# Altium PCB MidBoard.PcbDoc (part 2 of 3)
Units mm, origin at the board's own origin, x right, y up, seen from the top; angles counter-clockwise.
Board outline 150.95 x 96 mm, 2 copper layers (Top Layer, Bottom Layer); 315 components, 238 nets, 1021 pads, 291 vias.
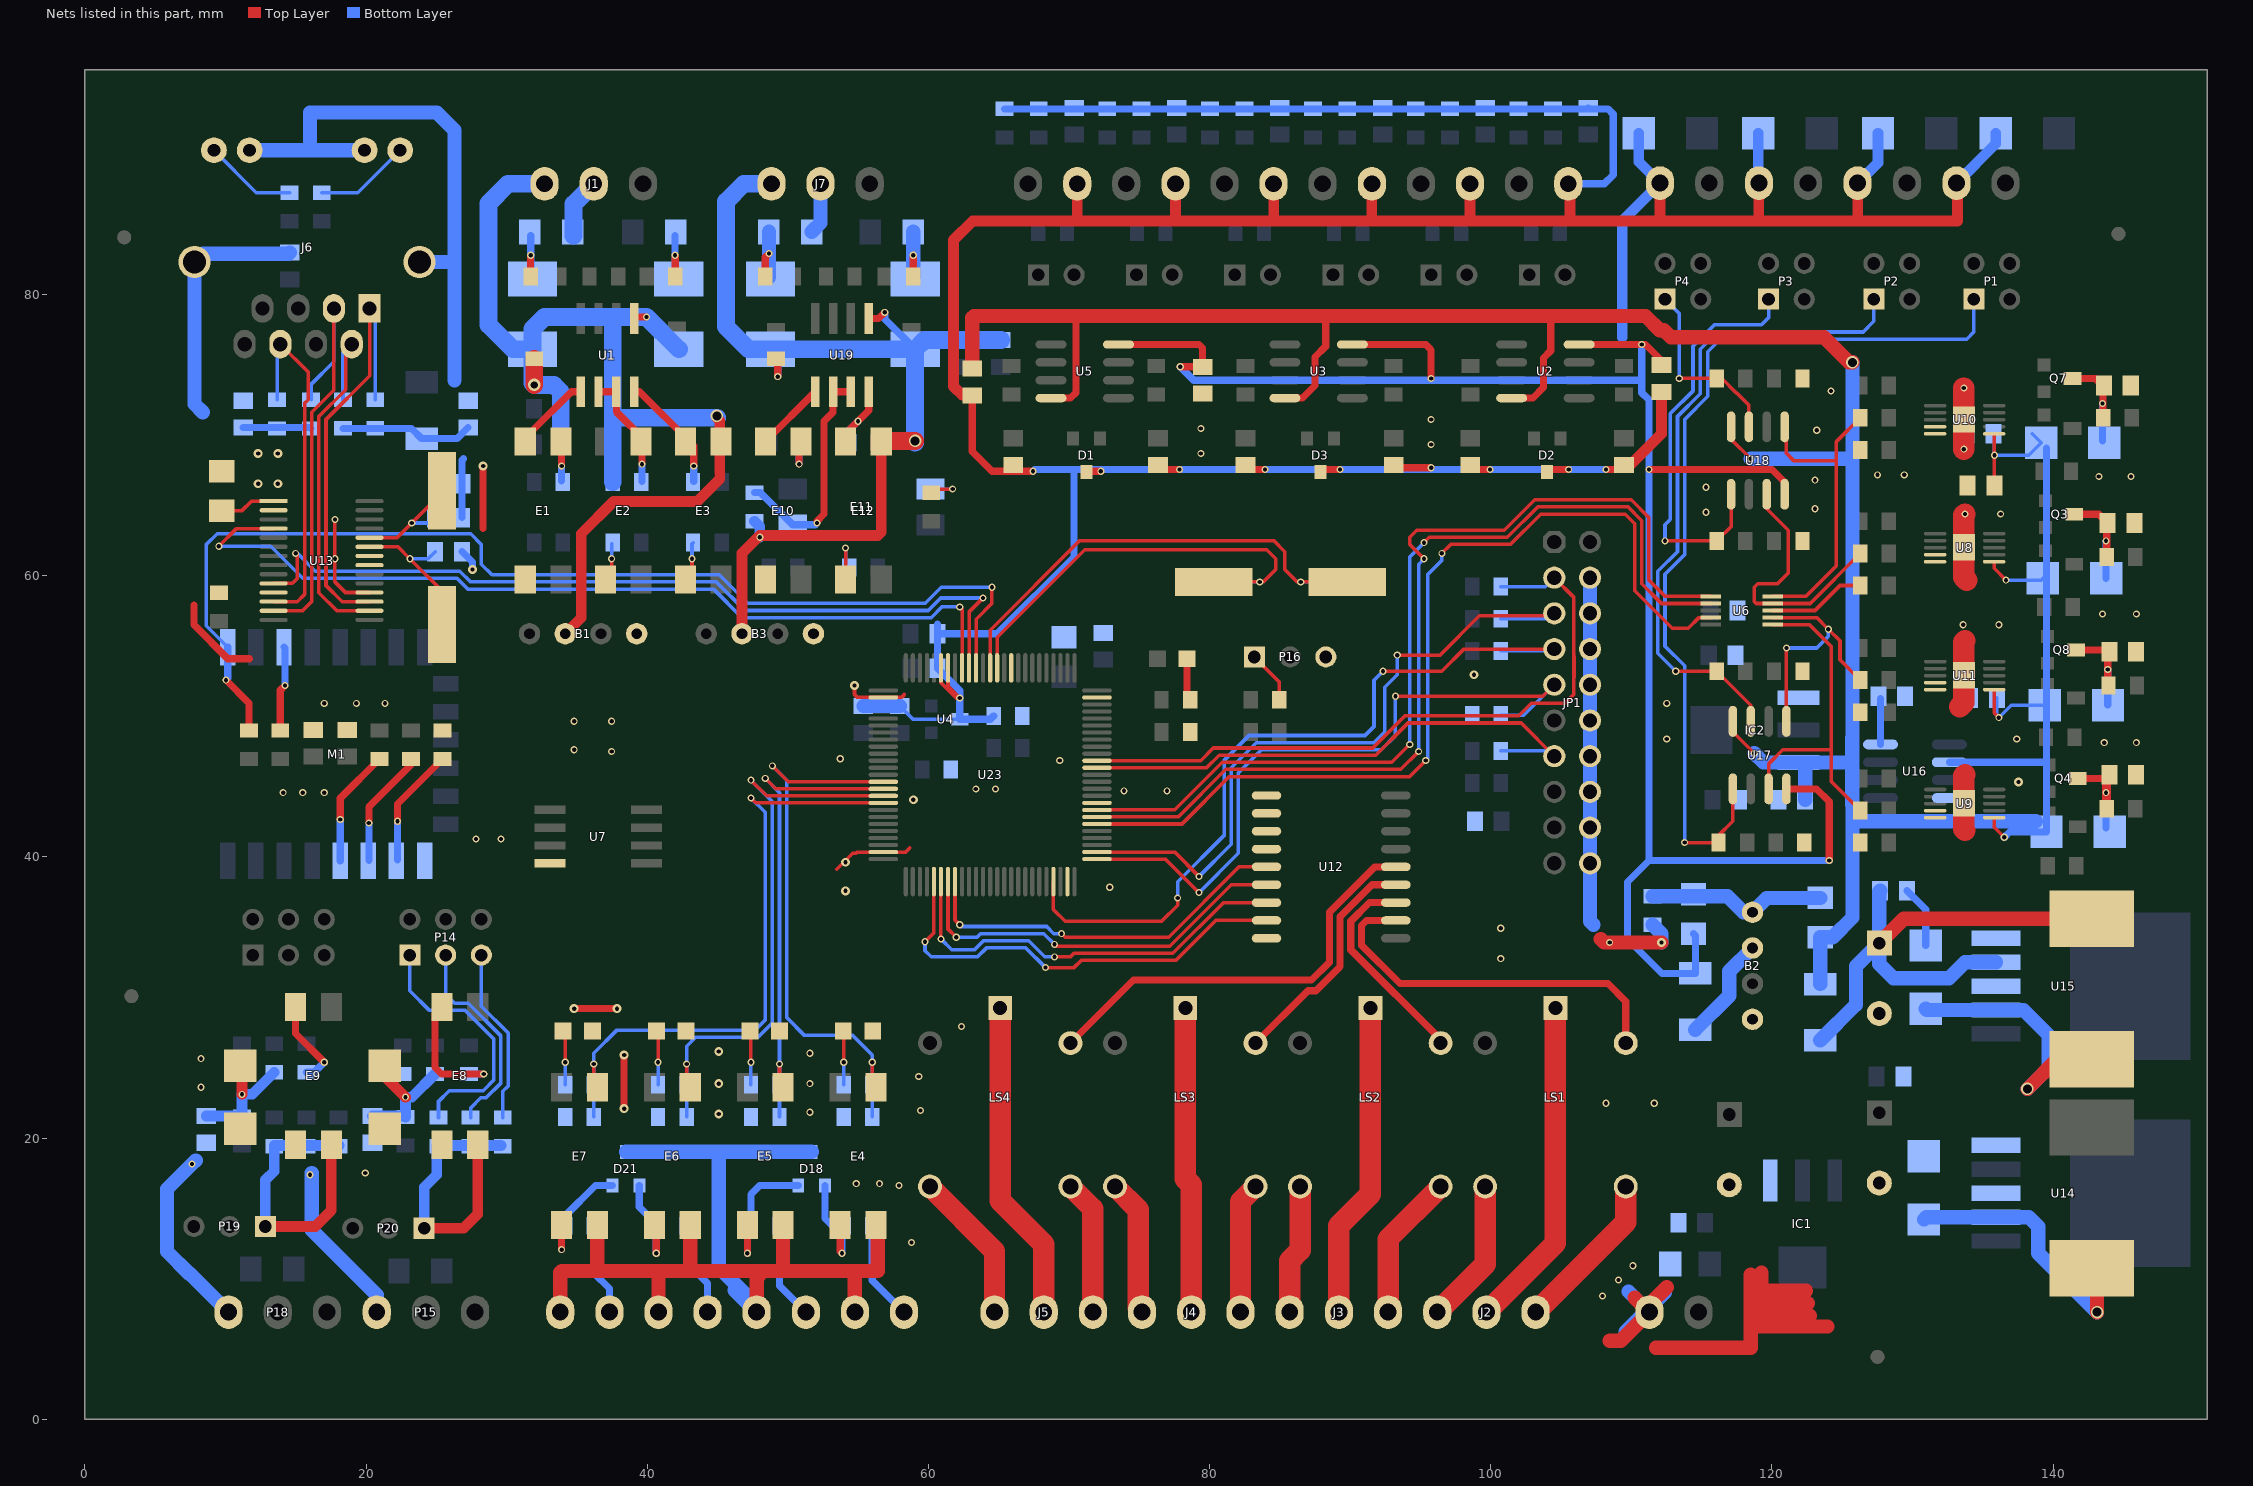
[diagram p2: the nets of this part, all layers, seen from the top]

## Via types
v1: diameter 0.508, hole 0.305, Top Layer to Bottom Layer, tented both sides, 235 vias
v2: diameter 0.635, hole 0.305, Top Layer to Bottom Layer, tented both sides, 33 vias
v3: diameter 0.889, hole 0.635, Top Layer to Bottom Layer, tented both sides, 18 vias
v4: diameter 5, hole 3.3, Top Layer to Bottom Layer, tented both sides, 4 vias
v5: diameter 0.889, hole 0.508, Top Layer to Bottom Layer, tented both sides, 1 vias

## Nets (pads, with @x,y where several pads share a name; then routed paths per layer and width w, separated by ;. In a path a pad name is that pad's centre, name@x,y a point inside that pad or via, vN(x,y) a via of type N, cw(c..) or ccw(c..) an arc to the next point about the centre after c; other vN are vias at no path point) (continued)
AOF1: R55.2 U6.1 U17.3 | length 24
  Top Layer w0.254: U17.3@119.761,44.844 119.761,46.609 120.777,47.625 124.206,47.625 ; U6.1@120.056,56.531 122.666,56.531 124.206,54.991 124.206,47.625 ; R55.2@126.286,43.307 124.206,45.387 124.206,47.625
AOF2: R69.2 U6.2 U17.5 | length 17.9
  Top Layer w0.254: U6.2@120.056,57.031 123.182,57.031 v1(124.012,56.201) 124.841,55.372 124.841,54.023 R69.2@126.286,52.578 ; U17.5@121.031,49.644 v1(121.031,54.864)
  Bottom Layer w0.254: v1(121.031,54.864) 123.19,54.864 124.012,55.686 v1(124.012,56.201)
AOF3: R53.2 U6.4 U18.3 | length 19.2
  Top Layer w0.254: U18.3@119.634,65.799 119.634,64.77 121.158,63.246 121.158,60.198 120.396,59.436 118.999,59.436 118.745,59.182 118.745,58.166 118.88,58.031 U6.4@120.056,58.031 122.722,58.031 R53.2@126.286,61.595
AOF4: R67.2 U6.5 U18.5 | length 22.4
  Top Layer w0.254: U6.5@120.056,58.531 122.412,58.531 124.587,60.706 124.587,68.199 ; U18.5@120.904,70.599 121.031,70.472 121.031,68.707 121.539,68.199 124.587,68.199 ; R67.2@126.286,71.247 124.587,69.548 124.587,68.199
ASSA: B2.4 C1.2 C2.2 C3.2 C4.2 C5.2 C6.2 C7.2 C8.2 C9.2 C10.2 C11.2 C12.2 C14.2 C15.2 C16.2 C17.2 C18.2 C19.2 C20.2 C21.2 C22.1 C23.1 C24.1 C25.2 C26.2 C27.2 C43.1 C47.2 C49.2 C50.2 C52.2 C53.2 C55.1 D1.3 D2.3 D3.3 D9.1 D10.1 D11.1 D12.1 IC2.3 P5.2 P6.2 P7.2 P8.2 PAI1.1 PAI2.1 PAI3.1 PAI4.1 PAI5.1 PAI6.1 R15.2 R16.2 R17.2 R18.2 R19.2 R20.2 R24.2 R25.2 R26.2 R27.2 R28.2 R29.2 R40.1 R44.1 R47.2 R50.2 R57.1 R61.2 R64.2 R68.1 R93.1 R101.2 U4.3 U6.3 U8.0 U8.9 U8.10 U9.0 U9.9 U9.10 U10.0 U10.9 U10.10 U11.0 U11.9 U11.10 U16.4 U23.19 U23.20 | length 337.1
  Top Layer w0.254: U23.20@60.889,53.447 60.889,52.395 61.976,51.308 v1(62.23,51.308) 61.389,52.149 U23.19@61.389,53.447 ; U6.3@120.056,57.531 123.063,57.531 124.841,59.309 R47.2@126.286,59.309
  Top Layer w0.508: C8.2@63.119,72.834 63.119,68.834 64.516,67.437 v1(67.437,67.437) ; D1.3@71.304,67.437 v1(72.263,67.437) ; C7.2@76.644,67.564 v1(77.851,67.564) ; C17.2@82.867,67.564 v1(83.947,67.564) ; D3.3@88.068,67.564 v1(89.281,67.564) ; C11.2@93.091,67.881 93.281,67.691 v1(95.758,67.691) ; C16.2@98.87,67.564 v1(99.949,67.564) ; D2.3@104.197,67.564 v1(105.537,67.564) ; v1(108.204,67.564) C10.2@109.156,67.564
  Top Layer w0.762: C8.2@63.119,72.834 62.42,72.834 61.785,73.469 61.785,83.883 63.147,85.245 70.584,85.245 ; PAI6.1@70.584,87.884 70.584,85.245 ; 77.569,85.344 PAI3.1@77.569,87.884 ; 84.554,85.344 PAI5.1@84.554,87.884 ; 91.539,85.273 PAI2.1@91.539,87.884 ; 98.524,85.344 PAI4.1@98.524,87.884 ; PAI1.1@105.509,87.884 105.636,87.757 105.636,85.245 ; C10.2@109.474,67.881 109.918,67.881 112.141,70.104 C14.2@112.141,73.088 ; 112.042,85.273 P8.2@112.042,87.932 ; 119.069,85.302 P7.2@119.069,87.932 ; 126.097,85.259 P6.2@126.097,87.932 ; P5.2@133.124,87.932 133.195,87.861 133.195,85.245 105.636,85.245 ; 70.584,85.245 105.636,85.245
  Top Layer w1.524: 133.35,50.673 133.652,50.975 U11.0@133.652,52.917 133.652,55.293 133.731,55.372 ; v1(133.652,69.009) U10.0@133.652,71.12 v1(133.652,73.358) ; 133.731,41.91 133.652,41.989 U9.0@133.652,43.815 133.652,45.768 133.731,45.847 ; v1(133.731,64.389) 133.652,64.31 U8.0@133.652,62.018 133.652,59.896 133.858,59.69
  Bottom Layer w0.254: C22.1@57.96,50.736 58.9,49.797 U4.3@62.23,49.797
  Bottom Layer w0.508: 60.642,56.578 C55.1@60.642,55.88 ; R101.2@64.643,50.038 64.402,49.797 U4.3@62.23,49.797 v1(62.23,51.308) 62.23,51.831 C24.1@60.642,53.419 C55.1@60.642,55.88 ; R29.2@65.405,93.217 R26.2@67.843,93.217 R20.2@72.72,93.217 R17.2@75.158,93.217 R28.2@80.035,93.217 R25.2@82.474,93.217 R19.2@87.35,93.217 R16.2@89.789,93.217 R27.2@94.665,93.217 R24.2@97.104,93.217 R18.2@101.981,93.217 R15.2@104.419,93.217 C1.2@106.87,93.217 ; v1(67.437,67.437) 67.564,67.564 70.358,67.564 ; PAI1.1@105.509,87.884 108.077,87.884 108.712,88.519 108.712,92.837 108.332,93.217 C1.2@106.87,93.217 ; C1.2@106.934,93.281 C1.2@106.87,93.217 ; 109.601,67.564 v1(108.204,67.564) v1(105.537,67.564) v1(99.949,67.564) v1(89.281,67.564) v1(83.947,67.564) v1(77.851,67.564) 70.358,67.564 ; C55.1@60.642,55.88 64.897,55.88 70.358,61.341 70.358,67.564
  Bottom Layer w0.762: 109.347,76.962 109.347,85.237 P8.2@112.042,87.932 110.526,89.448 D12.1@110.526,91.488 ; D11.1@119.035,91.488 119.035,87.966 P7.2@119.069,87.932 ; P6.2@126.097,87.932 127.544,89.379 D10.1@127.544,91.488 ; P5.2@133.124,87.932 135.926,90.734 D9.1@135.926,91.488
  Bottom Layer w1.016: C23.1@55.372,50.736 C22.1@57.96,50.736 ; R93.1@111.506,37.211 116.84,37.211 117.983,36.068 B2.4@118.618,36.068 119.637,37.087 C47.2@123.444,37.087
  other v1: 143.637,48.133 145.923,48.133 112.522,48.387 137.414,48.387 112.522,50.927 133.604,56.515 136.144,56.515 143.51,57.277 145.923,57.277 136.271,64.389 115.316,64.516 123.063,64.77 115.316,66.294 123.063,66.802 143.256,67.056 145.542,67.056 127.508,67.183 129.413,67.183 79.375,68.707 95.758,69.342 123.19,70.358 79.375,70.485 95.758,71.12 124.206,73.152
  other v2: 137.541,45.339
AVCC+12V: C8.1 C9.1 C18.1 C25.1 C47.1 C50.1 D13.2 D14.2 D15.2 D16.2 IC2.1 L5.2 U2.8 U3.8 U5.8 U8.1 U9.1 U10.1 U11.1 U16.2 U17.8 U18.8 | length 240.9
  Top Layer w0.254: U18.8@117.094,70.599 117.094,69.723 v1(118.491,68.326) ; U17.8@117.221,49.644 117.221,48.895 v1(118.745,47.371) ; U9.1@135.811,42.799 135.811,42.116 v1(136.525,41.402) ; U11.1@135.811,51.901 135.811,50.244 v1(136.144,49.911) ; U8.1@135.811,61.002 135.811,60.531 v1(136.652,59.69) ; U10.1@135.811,70.096 135.826,70.08 v1(135.826,68.58) C9.1@135.826,66.421
  Top Layer w0.508: U5.8@68.72,72.644 70.104,72.644 70.485,73.025 70.485,78.486 ; U3.8@85.357,72.644 86.614,72.644 87.503,73.533 87.503,75.565 88.265,76.327 88.265,78.486 ; U2.8@101.486,72.644 102.997,72.644 103.759,73.406 103.759,75.5 104.267,76.008 104.267,78.486
  Top Layer w1.016: C8.1@63.119,74.739 63.119,78.359 63.246,78.486 70.485,78.486 88.265,78.486 104.267,78.486 ; 95.377,78.486 111.008,78.486 112.024,77.47 112.308,77.47 112.816,76.962 123.698,76.962 125.476,75.184 v3(125.73,75.184)
  Bottom Layer w0.254: C25.1@135.826,70.025 v1(135.826,68.58) 138.26,68.58 D15.2@139.149,69.469 D15.2@138.514,70.104 ; C18.1@136.002,51.308 136.002,50.053 v1(136.144,49.911) 137.033,50.8 D16.2@139.403,50.8 ; v1(136.652,59.69) 139.149,59.69 D13.2@139.276,59.817
  Bottom Layer w0.508: U16.2@132.625,46.736 139.403,46.736 ; v1(136.525,41.402) 136.906,41.783 D14.2@139.53,41.783 D15.2@139.53,69.088
  Bottom Layer w1.016: v1(118.491,68.326) 125.73,68.326 ; v1(118.745,47.371) 119.394,46.722 IC2.1@121.897,46.722 125.699,46.722 ; C50.1@122.364,44.069 IC2.1@122.364,46.254 ; L5.2@123.444,30.956 C47.1@123.444,34.287 124.33,34.287 125.73,35.687 125.73,42.545 ; v3(125.73,75.184) 125.73,68.326 ; D14.2@138.768,42.545 125.73,42.545 ; 125.73,42.545 125.73,43.718 125.713,43.735 125.713,48.484 125.73,48.501 125.73,68.326
AVCC-12V: C12.1 C14.1 C43.2 L3.1 U2.4 U3.4 U5.4 U17.4 U18.4 | length 139.9
  Top Layer w0.508: U5.4@73.52,76.454 79.248,76.454 79.502,76.2 C12.1@79.502,74.866 v1(77.915,74.866) ; U3.4@90.157,76.454 95.377,76.454 95.758,76.073 v1(95.758,74.041) ; U2.4@106.286,76.454 v1(110.744,76.454) 110.998,76.454 112.141,75.311 C14.1@112.141,74.993 ; v1(111.252,67.564) 120.015,67.564 120.904,66.675 U18.4@120.904,65.799 ; U17.4@121.031,44.844 123.177,44.844 124.079,43.942 v1(124.079,39.751)
  Bottom Layer w0.508: v1(77.915,74.866) 78.867,73.914 110.744,73.914 ; v1(110.744,76.454) 110.744,73.914 ; C43.2@114.427,34.541 114.554,34.414 L3.1@114.554,31.718 112.173,31.718 109.728,34.163 109.728,38.227 111.252,39.751 ; v1(124.079,39.751) 111.252,39.751 ; 110.744,73.914 110.744,73.025 111.252,72.517 v1(111.252,67.564) 111.252,39.751
AVO1: P1.1 R43.2 U17.1 | length 65.3
  Top Layer w0.254: v1(113.792,41.021) R43.2@116.205,41.021 116.205,41.529 117.221,42.545 U17.1@117.221,44.844
  Bottom Layer w0.254: v1(113.792,41.021) 113.792,53.594 112.395,54.991 112.395,60.115 113.792,61.512 113.792,71.12 115.443,72.771 115.443,75.946 116.332,76.835 133.858,76.835 134.366,77.343 P1.1@134.366,79.677
AVO2: P2.1 R45.2 U17.7 | length 46.9
  Top Layer w0.254: v1(113.157,53.213) R45.2@116.078,53.213 118.491,50.8 U17.7@118.491,49.644
  Bottom Layer w0.254: v1(113.157,53.213) 111.887,54.483 111.887,60.325 113.284,61.722 113.284,71.33 114.893,72.94 114.893,76.115 116.122,77.343 126.492,77.343 127.254,78.105 P2.1@127.254,79.677
AVO3: P3.1 R66.2 U18.1 | length 29.6
  Top Layer w0.254: v1(112.395,62.484) R66.2@116.078,62.484 117.094,63.5 U18.1@117.094,65.799
  Bottom Layer w0.254: v1(112.395,62.484) 112.395,63.627 112.776,64.008 112.776,71.541 114.385,73.15 114.385,76.325 115.911,77.851 119.253,77.851 119.761,78.359 P3.1@119.761,79.677
AVO4: P4.1 R70.2 U18.7 | length 13.3
  Top Layer w0.254: v1(113.411,74.041) R70.2@116.078,74.041 116.428,74.041 117.444,73.025 117.475,73.025 118.364,72.136 U18.7@118.364,70.599
  Bottom Layer w0.254: P4.1@112.395,79.677 113.411,78.661 v1(113.411,74.041)
B1: J1.2 RT2.2 | length 4.3
  Bottom Layer w1.27: RT2.2@34.763,84.188 34.763,86.452 J1.2@36.195,87.884
B2: J7.2 RT4.2 | length 3.7
  Bottom Layer w1.016: RT4.2@51.702,84.468 52.324,85.09 J7.2@52.324,87.884
DAC_DIN: U6.7 U23.83 | length 65.9
  Top Layer w0.254: U23.83@71.989,43.347 77.51,43.347 80.899,46.736 92.964,46.736 v1(94.234,48.006) ; v1(95.25,62.357) 95.631,62.738 101.175,62.738 103.334,64.897 109.772,64.897 110.744,63.925 110.744,59.436 112.149,58.031 U6.7@115.656,58.031
  Bottom Layer w0.254: v1(94.234,48.006) 94.234,61.341 v1(95.25,62.357)
DAC_LDAC: U23.84
DAC_SCLK: U6.6 U23.82 | length 68.4
  Top Layer w0.254: U23.82@71.989,42.847 77.772,42.847 81.153,46.228 93.599,46.228 v1(94.869,47.498) ; v1@95.123,61.341 94.234,62.23 94.234,62.738 94.742,63.246 100.965,63.246 103.124,65.405 109.982,65.405 111.252,64.135 111.252,59.69 112.411,58.531 U6.6@115.656,58.531
  Bottom Layer w0.254: v1(94.869,47.498) 94.869,60.833 v1(95.25,61.214)
DAC_SYNC: U6.9 U23.81 | length 67.2
  Top Layer w0.254: U23.81@71.989,42.347 78.034,42.347 81.407,45.72 94.234,45.72 v1(95.377,46.863) ; v1(96.52,61.595) 97.155,62.23 101.386,62.23 103.545,64.389 109.561,64.389 110.236,63.714 110.236,58.928 112.903,56.261 114.046,56.261 114.816,57.031 U6.9@115.656,57.031
  Bottom Layer w0.254: v1(95.377,46.863) 95.504,46.99 95.504,60.071 96.52,61.087 v1(96.52,61.595)
DI_0: P9.2 R74.1 | length 7.1
  Bottom Layer w0.508: R74.1@56.007,13.764 56.007,9.878 P9.2@58.265,7.62
DI_1: P10.2 R77.1 | length 6.9
  Bottom Layer w0.508: R77.1@49.403,13.764 49.403,9.497 P10.2@51.28,7.62
DI_2: P11.2 R80.1 | length 6.8
  Bottom Layer w0.508: R80.1@42.799,13.764 43.152,13.411 43.152,10.795 44.295,9.652 P11.2@44.295,7.62
DI_3: P12.2 R83.1 | length 6.6
  Bottom Layer w0.508: R83.1@36.195,13.764 36.195,10.414 37.31,9.299 P12.2@37.31,7.62 P12.2@37.338,7.648
DO0: U12.8 U23.55 | length 31.9
  Top Layer w0.254: v1(59.753,33.972) 60.389,34.608 U23.55@60.389,38.247 ; v1(68.326,32.131) 70.358,32.131 70.866,32.639 77.593,32.639 80.437,35.483 U12.8@84.046,35.483
  Bottom Layer w0.254: v1(59.753,33.972) 59.753,33.337 60.198,32.893 63.491,32.893 64.126,33.528 66.929,33.528 v1(68.326,32.131)
DO1: U12.7 U23.56 | length 29.9
  Top Layer w0.254: v1(60.889,34.163) U23.56@60.889,38.247 ; v1(68.961,32.893) 70.104,32.893 70.358,33.147 77.383,33.147 80.989,36.753 U12.7@84.046,36.753
  Bottom Layer w0.254: v1(60.889,34.163) 61.651,33.401 63.281,33.401 63.916,34.036 67.139,34.036 68.282,32.893 v1(68.961,32.893)
DO2: U12.6 U23.57 | length 28.6
  Top Layer w0.254: U23.57@61.389,38.247 61.389,34.877 v1(61.976,34.29) ; v1(68.961,33.782) 69.088,33.655 77.172,33.655 81.54,38.023 U12.6@84.046,38.023
  Bottom Layer w0.254: v1(61.976,34.29) 63.451,34.29 63.705,34.544 68.199,34.544 v1(68.961,33.782)
DO3: U12.5 U23.58 | length 27.5
  Top Layer w0.254: U23.58@61.889,38.247 61.889,35.52 v1(62.23,35.179) ; v1(69.469,34.544) 69.723,34.29 77.089,34.29 82.092,39.293 U12.5@84.046,39.293
  Bottom Layer w0.254: v1(62.23,35.179) 62.357,35.052 68.409,35.052 68.917,34.544 v1(69.469,34.544)
DSI0: E4.3 R75.1 R76.1 U23.39 | length 39.8
  Top Layer w0.254: v1(48.895,46.482) 50.03,45.347 U23.39@56.789,45.347 ; E4.3@56.007,23.871 v1(56.007,25.4)
  Bottom Layer w0.254: v1(48.895,46.482) 49.911,45.466 49.911,28.575 51.181,27.305 54.61,27.305 56.007,25.908 v1(56.007,25.4) R75.1@56.007,23.797 R76.1@56.007,21.511
DSI1: E5.3 R78.1 R79.1 U23.40 | length 34.6
  Top Layer w0.254: v1(48.387,45.593) 49.133,44.847 U23.40@56.789,44.847 ; E5.3@49.403,23.871 v1(49.403,25.273)
  Bottom Layer w0.254: v1(48.387,45.593) 49.403,44.577 v1(49.403,25.273) R78.1@49.403,23.797 R79.1@49.403,21.511
DSI2: E6.3 R81.1 R82.1 U23.41 | length 41
  Top Layer w0.254: E6.3@42.799,23.871 v1(42.799,25.273) ; v1(47.371,45.466) 48.49,44.347 U23.41@56.789,44.347
  Bottom Layer w0.254: R82.1@42.799,21.511 R81.1@42.799,23.797 v1(42.799,25.273) 42.799,26.543 43.434,27.178 47.879,27.178 48.895,28.194 48.895,43.942 v1(47.371,45.466)
DSI3: E7.3 R84.1 R85.1 U23.42 | length 44.9
  Top Layer w0.254: E7.3@36.195,23.871 v1(36.195,25.273) ; v1(47.371,44.196) 47.72,43.847 U23.42@56.789,43.847
  Bottom Layer w0.254: R85.1@36.195,21.511 R84.1@36.195,23.797 v1(36.195,25.273) 36.195,26.035 37.846,27.686 47.669,27.686 48.387,28.404 48.387,43.18 v1(47.371,44.196)
ENC28J60_INT: U13.4 U23.17 | length 63.9
  Top Layer w0.254: v1(9.525,62.103) 10.784,63.362 U13.4@13.418,63.362 ; v1(62.23,57.785) 62.389,57.626 U23.17@62.389,53.447
  Bottom Layer w0.254: v1(9.525,62.103) 13.208,62.103 15.494,59.817 26.46,59.817 27.222,59.055 44.704,59.055 46.736,57.023 60.189,57.023 60.951,57.785 v1(62.23,57.785)
ENC28J60_RST: U13.10 U23.16 | length 59.8
  Top Layer w0.254: U13.10@13.418,59.462 14.758,59.462 15.113,59.817 v1@15.113,61.595 ; U23.16@62.889,53.447 62.889,57.428 v1(63.881,58.42)
  Bottom Layer w0.254: v1@15.113,61.595 16.383,60.325 26.67,60.325 27.432,59.563 44.914,59.563 46.946,57.531 59.979,57.531 60.868,58.42 v1(63.881,58.42)
  other v1: 14.986,61.595
ESP_RESET: M1.1 R127.1 U23.15 | length 80.3
  Top Layer w0.254: U23.15@63.389,53.447 63.389,56.912 64.516,58.039 v1(64.516,59.182)
  Top Layer w0.508: v1(10.033,52.578) 11.656,50.955 R127.1@11.656,49
  Bottom Layer w0.254: M1.1@10.157,54.923 8.636,56.444 8.636,62.23 9.398,62.992 27.432,62.992 28.194,62.23 28.194,60.833 28.956,60.071 45.125,60.071 47.157,58.039 59.768,58.039 60.911,59.182 v1(64.516,59.182)
  Bottom Layer w0.508: v1(10.033,52.578) 10.157,52.702 M1.1@10.157,54.923
GND: B1.1 B2.1 B3.1 C13.2 C28.1 C29.2 C30.1 C31.1 C32.1 C33.1 C34.1 C35.2 C36.1 C37.2 C38.2 C39.2 C44.2 C45.1 C54.2 C75.2 C76.1 C77.1 C78.1 C79.1 C80.2 C81.2 D17.2 D19.2 D20.2 D22.2 D23.1 D24.1 D25.1 D27.1 E1.3 E8.3 E9.3 E10.3 IC1.3 J6.10 J6.11 J6.13 JP1.4 JP1.6 JP1.8 JP1.10 JP1.12 JP1.14 JP1.16 JP1.18 JP1.20 M1.15 P13.1 P15.1 P16.3 P18.1 R56.2 R76.2 R79.2 R82.2 R85.2 R88.2 R93.2 R100.2 R101.1 R116.1 R123.1 R124.1 R131.1 U7.4 U12.1 U12.2 U12.3 U12.4 U12.9 U13.2 U13.11 U13.18 U13.21 U13.22 U14.3 U14.5 U15.3 U15.5 U23.10 U23.27 U23.49 U23.74 U23.99 | length 206.7
  Top Layer w0.254: v1(17.78,64.008) v1(17.78,61.214) 17.78,59.563 18.531,58.812 U13.18@20.243,58.812 ; 53.467,39.116 54.61,40.259 54.864,40.259 54.952,40.347 U23.49@56.789,40.347 58.381,40.347 58.674,40.64 ; v2(54.737,52.197) 54.737,51.562 54.952,51.347 U23.27@56.789,51.347 58.078,51.347 58.293,51.562
  Top Layer w0.508: 7.747,57.912 7.747,56.515 10.16,54.102 11.684,54.102 ; 28.321,63.373 v2(28.321,67.818) ; v2(34.798,29.21) v2(37.846,29.21) ; v2(38.354,22.098) v2(38.354,25.908)
  Top Layer w1.016: 107.823,34.163 108.077,33.909 v1(108.458,33.909) v2(112.141,33.909) ; 108.458,5.588 109.248,5.588 P13.1@111.266,7.606 ; 110.236,8.636 P13.1@111.266,7.606 ; P13.1@111.478,7.394 P13.1@111.266,7.606 ; 111.76,5.08 118.491,5.08 118.491,10.287 ; 112.522,9.398 111.28,8.156 P13.1@111.28,7.62 P13.1@111.266,7.606 ; 118.618,9.144 122.428,9.144 ; 118.745,6.604 119.253,6.604 ; 118.745,8.255 122.555,8.255 ; 118.872,7.366 122.682,7.366 ; 119.253,10.414 119.253,6.604 ; 123.952,6.604 119.253,6.604
  Bottom Layer w0.508: C31.1@26.812,61.722 27.559,60.975 v2(27.559,60.452) ; C30.1@26.812,64.135 26.812,68.214 26.924,68.326 ; C45.1@129.603,37.592 130.937,36.258 D24.1@130.937,33.698
  Bottom Layer w1.016: 7.874,18.415 v1(7.62,18.161) 5.842,16.383 5.842,11.938 7.422,10.358 7.478,10.358 P18.1@10.216,7.62 ; 8.382,71.628 7.797,72.213 J6.13@7.797,82.319 8.385,82.908 14.47,82.908 C32.1@14.557,82.994 ; J6.11@11.716,90.269 16.002,90.269 ; v1@16.129,17.526 16.129,13.462 20.757,8.834 P15.1@20.757,7.62 ; J6.10@19.891,90.269 16.002,90.269 ; J6.13@23.797,82.319 26.266,82.319 ; 26.289,73.914 26.289,91.694 25.019,92.964 16.002,92.964 16.002,90.269 ; JP1.4@107.059,59.869 JP1.6@107.059,57.329 JP1.8@107.059,54.789 JP1.10@107.059,52.249 JP1.12@107.059,49.709 JP1.14@107.059,47.169 JP1.16@107.059,44.629 JP1.18@107.059,42.089 JP1.20@107.059,39.549 107.059,35.435 107.315,35.179 ; 109.601,6.223 P13.1@110.843,7.465 ; 109.804,9.087 P13.1@111.046,7.845 ; P13.1@111.153,7.775 112.395,9.017 ; R93.2@111.506,35.179 112.141,34.544 v2(112.141,33.909)
  other v1: 107.95,8.763 109.093,9.906 110.109,10.922 58.801,12.573 57.912,16.637 54.864,16.764 56.515,16.764 16.002,17.399 19.939,17.526 51.562,21.844 59.436,21.971 108.204,22.479 111.633,22.479 8.255,23.622 51.562,23.876 59.309,24.384 8.255,25.654 51.562,26.035 62.357,27.94 100.711,32.766 100.711,34.925 72.898,37.846 27.813,41.275 29.591,41.275 14.097,44.577 15.494,44.577 17.018,44.577 73.914,44.704 76.962,44.704 63.373,44.831 64.77,44.831 69.342,46.863 53.721,46.99 37.465,47.498 34.798,47.625 34.798,49.657 37.465,49.657 17.018,50.927 19.304,50.927 21.336,50.927
  other v2: 45.085,21.717 45.085,23.876 45.085,26.162 54.102,37.592 54.102,39.624 58.928,44.069 98.806,52.959 12.319,66.548 13.716,66.548 12.319,68.707 13.716,68.707
GND_485-1: B1.3 C41.1 C42.1 E3.3 F1.1 F2.2 J1.3 R8.2 R10.2 U1.5 | length 83.7
  Top Layer w0.508: U1.5@39.183,78.407 v1(39.949,78.407)
  Top Layer w0.762: B1.3@34.163,55.88 35.306,57.023 35.306,62.992 37.592,65.278 43.561,65.278 45.164,66.881 45.164,71.041 v3@44.958,71.247
  Top Layer w1.27: v5(31.956,73.581) R8.2@31.956,75.438
  Bottom Layer w1.27: v5@31.829,73.708 F2.2@31.829,76.113 ; v5(31.956,73.581) 33.353,73.581 33.846,73.088 C42.1@33.846,71.882 C41.1@33.846,69.342 ; J1.3@32.695,87.884 30.099,87.884 28.702,86.487 28.702,77.851 30.44,76.113 F2.2@31.829,76.113 ; R10.2@37.544,66.675 37.544,71.247 ; F1.1@42.243,76.113 v1(39.949,78.407) 37.544,78.407 ; v3@44.958,71.247 37.544,71.247 ; F2.2@31.829,76.113 31.829,77.549 32.687,78.407 37.544,78.407 ; 37.544,71.247 37.544,78.407
  other v3: 44.958,71.374
GND_485-2: B3.3 C40.1 C46.1 E12.3 F3.1 F4.2 J7.3 R107.2 R108.2 U19.5 | length 74.5
  Top Layer w0.508: R107.2@49.149,75.438 49.276,75.311 v1(49.276,74.168) ; U19.5@55.753,78.292 56.448,78.292 v1(56.896,78.74)
  Top Layer w0.762: B3.3@46.736,55.88 46.736,61.595 48.006,62.865 56.388,62.865 56.642,63.119 E12.3@56.642,69.543
  Top Layer w1.27: E12.3@56.642,69.543 56.695,69.596 v3(59.055,69.596)
  Bottom Layer w0.508: F4.2@48.768,76.113 49.276,75.605 v1(49.276,74.168) ; v1(56.896,78.74) 56.896,78.272 F3.1@59.055,76.113
  Bottom Layer w0.762: R108.2@47.625,63.881 48.006,63.5 v1(48.006,62.738)
  Bottom Layer w1.27: J7.3@48.824,87.884 46.863,87.884 45.593,86.614 45.593,77.724 47.204,76.113 F4.2@48.768,76.113 F3.1@59.055,76.113 ; v3@59.055,69.469 v3(59.055,69.596) F3.1@59.055,76.113 ; C40.1@65.151,76.771 C46.1@62.738,76.771 59.714,76.771 F3.1@59.055,76.113
GND_DI: D18.3 D21.3 E4.2 E5.2 E6.2 E7.2 P9.1 P10.1 P11.1 P12.1 | length 75.5
  Top Layer w1.016: P12.1@33.81,7.62 33.81,10.442 33.909,10.541 36.449,10.541 ; E7.2@36.449,13.817 36.449,10.541 ; P11.1@40.795,7.62 40.795,10.442 40.894,10.541 ; E6.2@43.053,13.817 43.053,10.541 ; P10.1@47.78,7.62 47.78,10.061 48.26,10.541 ; E5.2@49.657,13.817 49.657,10.541 ; P9.1@54.765,7.62 54.765,10.513 54.737,10.541 ; E4.2@56.261,13.817 56.388,13.69 56.388,10.541 54.737,10.541 ; 36.449,10.541 40.894,10.541 ; 40.894,10.541 43.053,10.541 ; 43.053,10.541 48.26,10.541 ; 48.26,10.541 49.657,10.541 ; 49.657,10.541 54.737,10.541
  Bottom Layer w1.016: D21.3@38.481,19.028 45.085,19.028 ; 46.228,9.172 P10.1@47.78,7.62 47.78,8.1 45.085,10.795 45.085,19.028 ; D18.3@51.689,19.028 45.085,19.028
JNTRST: JP1.3 R118.1 U23.90 | length 48.8
  Top Layer w0.254: U23.90@71.989,46.847 79.359,46.847 80.264,47.752 91.611,47.752 93.897,50.038 101.981,50.038 102.87,50.927 105.283,50.927 105.891,51.535 105.891,52.76 105.918,52.788 105.918,54.278 105.891,54.305 105.891,58.497 JP1.3@104.519,59.869
  Bottom Layer w0.254: R118.1@100.711,59.23 103.88,59.23 JP1.3@104.519,59.869
JTCK: JP1.9 R123.2 U23.76 | length 49.3
  Top Layer w0.254: U23.76@71.989,39.847 76.866,39.847 v1(79.248,37.465) ; v1(93.218,51.435) 103.705,51.435 JP1.9@104.519,52.249
  Bottom Layer w0.254: v1(79.248,37.465) 82.042,40.259 82.042,45.974 83.693,47.625 92.202,47.625 93.218,48.641 v1(93.218,51.435) ; R123.2@100.711,50.086 102.356,50.086 JP1.9@104.519,52.249
JTDI: JP1.5 R119.1 U23.77 | length 51
  Top Layer w0.254: U23.77@71.989,40.347 77.509,40.347 v1(79.248,38.608) ; v1(93.345,54.356) 96.393,54.356 99.187,57.15 JP1.5@104.521,57.15 ; JP1.5@104.34,57.15 JP1.5@104.519,57.329
  Bottom Layer w0.254: v1(79.248,38.608) 81.534,40.894 81.534,46.355 83.312,48.133 91.694,48.133 92.456,48.895 92.456,52.07 93.345,52.959 v1(93.345,54.356) ; R119.1@100.711,56.944 104.134,56.944 JP1.5@104.519,57.329
JTDO: JP1.13 R117.1 U23.89 | length 39.3
  Top Layer w0.254: U23.89@71.989,46.347 78.732,46.347 ; 78.232,46.339 79.784,46.339 80.689,47.244 91.821,47.244 94.107,49.53 102.158,49.53 JP1.13@104.519,47.169
  Bottom Layer w0.254: R117.1@100.711,47.546 104.142,47.546 JP1.13@104.519,47.169
JTMS: JP1.7 R120.1 U23.72 | length 56
  Top Layer w0.254: U23.72@68.889,38.247 68.889,36.267 69.723,35.433 76.581,35.433 77.724,36.576 v1(77.724,37.084) ; v1(92.329,53.213) 96.52,53.213 98.096,54.789 JP1.7@104.648,54.789
  Bottom Layer w0.254: v1(77.724,37.084) 77.724,38.227 81.026,41.529 81.026,46.863 82.804,48.641 91.059,48.641 91.694,49.276 91.694,52.578 v1(92.329,53.213) ; R120.1@100.711,54.658 104.388,54.658 JP1.7@104.519,54.789
NetB2_3: B2.3 L3.2 | length 7.5
  Bottom Layer w1.016: L3.2@114.554,27.718 116.967,30.131 116.967,31.877 B2.3@118.618,33.528
NetC13_1: C13.1 D27.2 R52.2 R54.1 | length 9.2
  Top Layer w0.762: D27.2@11.049,25.158 11.176,25.031 v1(11.176,23.114)
  Bottom Layer w0.762: C13.1@8.636,21.575 11.112,21.575 R52.2@11.176,21.511 v1(11.176,23.114) 11.89,23.114 R54.1@13.462,24.686
NetC20_1: C20.1 D13.1 Q3.3 R58.1 | length 7.7
  Top Layer w0.508: Q3.3@141.501,64.376 143.253,64.376 143.812,63.817 R58.1@143.812,61.341
  Bottom Layer w0.508: D13.1@143.764,59.829 v1(143.764,62.484)
NetC21_1: C21.1 D14.1 Q4.3 R59.1 | length 9.8
  Top Layer w0.254: C21.1@143.736,45.58 C21.1@144.003,45.847 144.003,43.624 R59.1@143.812,43.434 R59.1@144.03,43.216
  Top Layer w0.508: Q4.3@141.755,45.58 143.736,45.58 R59.1@143.736,43.51
  Bottom Layer w0.508: D14.1@143.764,42.049 v1(143.764,44.577)
NetC26_1: C26.1 D15.1 Q7.3 R72.1 | length 7.3
  Top Layer w0.508: Q7.3@141.374,74.028 142.999,74.028 143.558,73.469 R72.1@143.558,71.247
  Bottom Layer w0.508: D15.1@143.51,69.608 v1(143.51,72.263)
NetC27_1: C27.1 D16.1 Q8.3 R73.1 | length 9.8
  Top Layer w0.254: R73.1@143.891,52.149 R73.1@143.939,52.197 144.003,52.26 C27.1@144.003,54.61
  Top Layer w0.508: Q8.3@141.628,54.724 143.888,54.724 143.888,52.248 R73.1@143.939,52.197
  Bottom Layer w0.508: D16.1@143.891,50.812 v1(143.891,53.34)
NetC29_1: C29.1 U13.1 | length 4
  Top Layer w0.254: C29.1@9.731,64.64 11.173,64.64 11.845,65.312 U13.1@13.418,65.312
NetC30_2: C30.2 U13.24 Y1.1 | length 8.4
  Top Layer w0.254: U13.24@20.243,62.712 22.199,62.712 v1(23.241,63.754) 25.4,65.913 Y1.1@25.4,66.04
  Bottom Layer w0.254: v1(23.241,63.754) 24.526,63.754 C30.2@24.907,64.135
NetC31_2: C31.2 U13.23 Y1.2 | length 10.8
  Top Layer w0.254: U13.23@20.243,62.062 22.266,62.062 v1(23.114,61.214) 25.4,58.928 Y1.2@25.4,56.54
  Bottom Layer w0.254: v1(23.114,61.214) 24.399,61.214 C31.2@24.907,61.722
NetC33_2: C33.2 L1.2 R89.2 R90.2 | length 9.5
  Bottom Layer w0.508: R90.2@18.357,70.486 R89.2@20.653,70.486 23.224,70.486 L1.2@23.955,69.755 26.463,69.755 C33.2@27.257,70.548
NetC34_2: C34.2 R91.2 R92.2 | length 4.9
  Bottom Layer w0.508: C34.2@11.255,70.548 16.017,70.548 R91.2@16.081,70.485
NetC44_1: C44.1 C45.2 L4.2 L5.1 U15.4 | length 38.9
  Top Layer w1.016: C44.1@127.635,33.869 129.373,35.607 L4.2@142.748,35.607
  Bottom Layer w1.016: L5.1@123.444,26.956 125.984,29.496 125.984,32.218 C44.1@127.635,33.869 ; C45.2@127.698,37.592 127.635,37.529 C44.1@127.635,33.869 ; U15.4@135.936,32.513 133.732,32.513 132.588,31.369 128.651,31.369 127.635,32.385 C44.1@127.635,33.869
NetC53_1: C53.1 U16.8 | length 3.3
  Bottom Layer w0.508: U16.8@127.725,48.006 C53.1@127.725,51.281
NetC54_1: C54.1 D25.2 R98.2 R99.1 | length 9.4
  Top Layer w0.762: D25.2@21.336,25.158 21.336,24.384 v1(22.806,22.914)
  Bottom Layer w0.762: C54.1@20.451,21.575 22.741,21.575 R98.2@22.806,21.51 v1(22.806,22.914) 23.247,22.914 R99.1@24.892,24.559
NetC78_2: C78.2 U23.12 Y2.2 | length 31.6
  Top Layer w0.254: U23.12@64.889,53.447 64.889,55.626 71.112,61.849 84.074,61.849 84.709,61.214 84.709,60.452 83.82,59.563 v1(83.566,59.563) 80.416,59.563 Y2.2@80.289,59.436
  Bottom Layer w0.254: C78.2@82.359,59.563 v1(83.566,59.563)
NetC79_2: C79.2 U23.13 Y2.1 | length 33.9
  Top Layer w0.254: U23.13@64.389,53.447 64.389,56.134 70.739,62.484 84.582,62.484 85.344,61.722 85.344,60.452 86.233,59.563 v1(86.487,59.563) 89.662,59.563 Y2.1@89.789,59.436
  Bottom Layer w0.254: v1(86.487,59.563) C79.2@87.694,59.563
NetD17_1: D17.1 R75.2 | length 3.8
  Top Layer w0.254: D17.1@53.941,27.607 53.975,27.573 v1(53.975,25.4)
  Bottom Layer w0.254: R75.2@53.975,23.797 v1(53.975,25.4)
NetD18_1: D18.1 E4.1 R74.2 | length 8
  Top Layer w0.508: E4.1@53.721,13.817 53.721,11.938 v1(53.848,11.811)
  Bottom Layer w0.508: D18.1@52.639,16.628 52.639,14.29 53.165,13.764 R74.2@53.975,13.764 53.848,13.637 v1(53.848,11.811)
NetD18_2: D18.2 E5.1 R77.2 | length 9.9
  Top Layer w0.508: v1(47.117,11.811) E5.1@47.117,13.817
  Bottom Layer w0.508: v1(47.117,11.811) 47.117,13.51 R77.2@47.371,13.764 47.371,16.002 47.997,16.628 D18.2@50.739,16.628
NetD19_1: D19.1 R78.2 | length 3.8
  Top Layer w0.254: D19.1@47.295,27.607 47.371,27.531 v1(47.371,25.4)
  Bottom Layer w0.254: R78.2@47.371,23.797 v1(47.371,25.4)
NetD20_1: D20.1 R81.2 | length 3.7
  Top Layer w0.254: v1(40.767,25.4) D20.1@40.767,27.488
  Bottom Layer w0.254: R81.2@40.767,23.797 v1(40.767,25.4)
NetD21_1: D21.1 E6.1 R80.2 | length 7.1
  Top Layer w0.508: v1(40.64,11.811) E6.1@40.64,13.69
  Bottom Layer w0.508: D21.1@39.431,16.628 39.431,15.1 R80.2@40.767,13.764 ; v1(40.64,11.811) R80.2@40.64,13.637
NetD21_2: D21.2 E7.1 R83.2 | length 8.5
  Top Layer w0.508: v1(33.909,12.065) E7.1@33.909,13.817
  Bottom Layer w0.508: v1(33.909,12.065) 33.909,13.51 R83.2@34.163,13.764 34.163,14.478 36.313,16.628 D21.2@37.531,16.628
NetD22_1: D22.1 R84.2 | length 3.6
  Top Layer w0.254: v1(34.163,25.4) D22.1@34.163,27.446
  Bottom Layer w0.254: R84.2@34.163,23.797 v1(34.163,25.4)
NetD23_2: D23.2 L2.1 U14.2 | length 19.6
  Top Layer w1.016: L2.1@142.748,10.748 143.129,10.367 v3(143.129,7.62)
  Bottom Layer w1.016: D23.2@130.81,14.212 130.979,14.381 U14.2@135.936,14.381 138.273,14.381 138.938,13.716 138.938,11.811 v3(143.129,7.62)
NetD24_2: D24.2 L4.1 U15.2 | length 19.4
  Top Layer w1.016: v3(138.176,23.495) 140.288,25.607 L4.1@142.748,25.607
  Bottom Layer w1.016: D24.2@130.937,29.198 131.022,29.113 U15.2@135.936,29.113 137.892,29.113 139.7,27.305 139.7,25.019 v3(138.176,23.495)
NetD26_2: D26.2 R121.2 | length 3
  Top Layer w0.508: D26.2@78.393,54.102 78.393,51.401 R121.2@78.613,51.181
NetE1_1: E1.1 R3.2 | length 2.5
  Top Layer w0.508: v1(33.909,67.818) E1.1@33.909,69.21
  Bottom Layer w0.508: R3.2@33.909,66.754 v1(33.909,67.818)
NetE1_2: E1.2 U1.1 | length 5.4
  Top Layer w0.508: E1.2@31.702,69.543 31.702,70.183 34.611,73.092 U1.1@35.258,73.092
NetE2_1: E2.1 R6.1 | length 2.4
  Top Layer w0.254: E2.1@37.465,59.918 v1(37.465,61.214)
  Bottom Layer w0.254: v1(37.465,61.214) R6.1@37.465,62.278
NetE2_3: E2.3 R10.1 U1.2 U1.3 | length 8.3
  Top Layer w0.508: U1.2@36.528,73.092 U1.3@37.798,73.092 37.798,71.676 39.83,69.644 E2.3@39.83,69.543 ; v1(39.624,67.945) E2.3@39.624,69.337
  Bottom Layer w0.508: R10.1@39.624,66.723 v1(39.624,67.945)
NetE3_1: E3.1 R11.1 | length 2.8
  Top Layer w0.254: E3.1@42.711,59.743 43.18,60.211 v1(43.18,61.214)
  Bottom Layer w0.254: v1(43.18,61.214) 43.18,62.278 R11.1@43.259,62.357
NetE3_4: E3.4 R9.2 U1.4 | length 7.9
  Top Layer w0.508: U1.4@39.068,73.092 39.456,73.092 E3.4@43.005,69.543 ; v1(43.307,67.818) E3.4@43.307,69.241
  Bottom Layer w0.508: R9.2@43.307,66.723 v1(43.307,67.818)
NetE8_2: E8.2 R97.1 | length 9.3
  Top Layer w0.508: E8.2@25.4,29.332 24.892,28.824 24.892,25.019 25.352,24.559 v1(28.369,24.559)
  Bottom Layer w0.508: R97.1@27.305,24.559 v1(28.369,24.559)
NetE8_4: E8.4 P20.1 R94.2 R95.2 R96.2 | length 20
  Top Layer w0.762: P20.1@24.13,13.589 26.924,13.589 27.94,14.605 E8.4@27.94,19.532
  Bottom Layer w0.762: P20.1@24.13,13.589 24.13,16.51 25.019,17.399 25.019,19.479 27.432,19.479 R96.2@29.591,19.479
NetE9_2: E9.2 R42.1 | length 6.3
  Top Layer w0.508: E9.2@14.986,29.332 14.986,27.432 v1(17.018,25.4)
  Bottom Layer w0.508: R42.1@15.748,24.686 16.304,24.686 v1(17.018,25.4)
NetE9_4: E9.4 P19.1 R35.2 R36.2 R41.2 | length 20.5
  Top Layer w0.762: P19.1@12.827,13.716 16.383,13.716 17.526,14.859 E9.4@17.526,19.532
  Bottom Layer w0.762: P19.1@12.827,13.716 12.827,17.018 13.462,17.653 13.462,19.479 18.069,19.479 R41.2@18.07,19.478
NetE10_1: E10.1 R102.2 | length 3.2
  Top Layer w0.508: v1(50.8,67.945) 50.8,69.396 E10.1@50.947,69.543
  Bottom Layer w0.508: v1(50.8,67.945) R102.2@50.8,69.469
NetE10_2: E10.2 U19.1 | length 5
  Top Layer w0.508: E10.2@48.407,69.543 48.407,69.556 U19.1@51.943,73.092
NetE11_1: E11.1 R104.1 | length 2.8
  Top Layer w0.254: R104.1@60.452,66.167 v1(61.722,66.167)
  Bottom Layer w0.254: E11.1@60.145,66.167 v1(61.722,66.167)
NetE11_3: E11.3 R108.1 U19.2 U19.3 | length 16.5
  Top Layer w0.508: v1(52.07,63.754) 52.07,63.881 52.578,64.389 52.578,70.993 53.213,71.628 U19.2@53.213,73.092 U19.3@54.483,73.092
  Bottom Layer w0.508: R108.1@47.625,65.913 48.059,65.913 E11.3@50.345,63.627 51.943,63.627 v1(52.07,63.754)
NetE12_1: E12.1 R110.1 | length 3.6
  Top Layer w0.254: v1(54.102,61.976) E12.1@54.102,59.743 E12.1@54.229,59.87
  Bottom Layer w0.254: R110.1@54.102,60.833 v1(54.102,61.976)
NetE12_4: E12.4 R109.2 U19.4 | length 6
  Top Layer w0.508: E12.4@54.102,69.543 54.102,70.104 v1(54.991,70.993) 55.753,71.755 U19.4@55.753,73.092
  Bottom Layer w0.508: R109.2@54.356,69.469 54.356,70.358 v1(54.991,70.993)
NetF1_2: F1.2 R4.2 RT1.1 | length 4.3
  Top Layer w0.508: R4.2@41.989,81.28 v1@41.989,82.791
  Bottom Layer w0.508: F1.2@41.976,81.38 v1(41.976,82.804) RT1.1@41.976,84.214
NetF2_1: F2.1 R7.2 RT2.1 | length 4.5
  Top Layer w0.508: R7.2@31.702,81.28 v1@31.702,82.791
  Bottom Layer w0.508: F2.1@31.715,81.227 v1(31.715,82.804) RT2.1@31.715,84.188
NetF3_2: F3.2 R103.2 RT3.1 | length 4.7
  Top Layer w0.508: v1(58.915,82.804) 58.915,81.293 R103.2@58.928,81.28
  Bottom Layer w1.016: F3.2@58.915,81.253 v1(58.915,82.804) RT3.1@58.915,84.468
NetF4_1: F4.1 R106.2 RT4.1 | length 5
  Top Layer w0.508: R106.2@48.387,81.28 48.387,82.664 v1(48.654,82.931)
  Bottom Layer w1.016: F4.1@48.654,81.227 v1(48.654,82.931) RT4.1@48.654,84.468
NetJ2_1: J2.1 LS1.3 | length 10.3
  Top Layer w1.524: J2.1@96.195,7.62 99.601,11.026 LS1.3@99.601,16.558
NetJ2_2: J2.2 LS1.1 | length 23.7
  Top Layer w1.524: J2.2@99.695,7.62 104.601,12.526 LS1.1@104.601,29.258
NetJ2_3: J2.3 LS1.4 | length 11.6
  Top Layer w1.524: J2.3@103.195,7.62 109.601,14.026 LS1.4@109.601,16.558
NetJ3_1: J3.1 LS2.3 | length 9.2
  Top Layer w1.524: J3.1@85.696,7.62 85.696,11.274 86.435,12.013 LS2.3@86.435,16.558
NetJ3_2: J3.2 LS2.1 | length 22.6
  Top Layer w1.524: J3.2@89.196,7.62 89.196,13.758 91.435,15.997 LS2.1@91.435,29.258
NetJ3_3: J3.3 LS2.4 | length 10.5
  Top Layer w1.524: J3.3@92.696,7.62 92.696,12.819 LS2.4@96.435,16.558
NetJ4_1: J4.1 LS3.3 | length 9.7
  Top Layer w1.524: LS3.3@73.27,16.558 74.93,14.898 74.93,7.888 J4.1@75.198,7.62
NetJ4_2: J4.2 LS3.1 | length 21.8
  Top Layer w1.524: LS3.1@78.27,29.258 78.27,17.107 78.698,16.679 J4.2@78.698,7.62
NetJ4_3: J4.3 LS3.4 | length 9.4
  Top Layer w1.524: J4.3@82.198,7.62 82.198,15.486 LS3.4@83.27,16.558
NetJ5_1: J5.1 LS4.3 | length 10.8
  Top Layer w1.524: LS4.3@60.104,16.558 64.699,11.963 J5.1@64.699,7.62
NetJ5_2: J5.2 LS4.1 | length 22.9
  Top Layer w1.524: LS4.1@65.104,29.258 65.104,15.541 68.199,12.446 J5.2@68.199,7.62
NetJ5_3: J5.3 LS4.4 | length 9.6
  Top Layer w1.524: LS4.4@70.104,16.558 71.699,14.963 J5.3@71.699,7.62
NetJ6_1: J6.1 R89.1 U13.17 | length 31.2
  Top Layer w0.254: U13.17@20.243,58.162 18.292,58.162 17.145,59.309 17.145,71.12 20.247,74.222 J6.1@20.247,79.019
  Bottom Layer w0.254: J6.1@20.247,79.019 20.653,78.613 R89.1@20.653,72.518
NetJ6_2: J6.2 R90.1 U13.16 | length 27
  Top Layer w0.254: J6.2@18.977,76.479 18.542,76.045 18.542,73.235 16.637,71.33 16.637,58.801 17.926,57.512 U13.16@20.243,57.512
  Bottom Layer w0.254: R90.1@18.357,72.518 18.357,75.86 J6.2@18.977,76.479
NetJ6_3: J6.3 R91.1 U13.13 | length 31.7
  Top Layer w0.254: U13.13@13.418,57.512 15.475,57.512 16.129,58.166 16.129,71.628 17.707,73.206 J6.3@17.707,79.019
  Bottom Layer w0.254: R91.1@16.081,72.517 16.081,73.612 17.707,75.238 J6.3@17.707,79.019
NetJ6_6: J6.6 R92.1 U13.12 | length 25.2
  Top Layer w0.254: U13.12@13.418,58.162 15.109,58.162 15.621,58.674 15.621,72.263 15.875,72.517 15.875,74.501 J6.6@13.897,76.479
  Bottom Layer w0.254: R92.1@13.668,72.517 13.668,76.251 J6.6@13.897,76.479
NetJ6_9: J6.9 R86.1 | length 6.8
  Bottom Layer w0.254: R86.1@16.843,87.249 19.401,87.249 J6.9@22.422,90.269
NetJ6_12: J6.12 R87.1 | length 6.6
  Bottom Layer w0.254: J6.12@9.172,90.269 12.193,87.249 R87.1@14.557,87.249
NetLS1_5: LS1.5 U12.11 | length 27.4
  Top Layer w0.508: U12.11@93.246,35.483 91.171,35.483 90.805,35.117 90.805,33.717 93.534,30.988 108.331,30.988 109.601,29.718 LS1.5@109.601,26.758
NetLS2_5: LS2.5 U12.12 | length 15.1
  Top Layer w0.508: U12.12@93.246,36.753 91.363,36.753 90.043,35.433 90.043,33.401 96.435,27.009 LS2.5@96.435,26.758
NetLS3_5: LS3.5 U12.13 | length 16.7
  Top Layer w0.508: LS3.5@83.27,26.758 86.992,30.48 87.565,30.48 89.281,32.196 89.281,35.752 91.552,38.023 U12.13@93.246,38.023
NetLS4_5: LS4.5 U12.14 | length 30.4
  Top Layer w0.508: LS4.5@70.104,26.758 74.588,31.242 87.249,31.242 88.519,32.512 88.519,36.068 91.744,39.293 U12.14@93.246,39.293
NetM1_3: M1.3 R128.1 | length 6.1
  Top Layer w0.508: R128.1@13.891,49 13.891,51.864 v1(14.224,52.197)
  Bottom Layer w0.508: M1.3@14.157,54.923 14.224,54.856 v1(14.224,52.197)
NetM1_16: M1.16 R131.2 | length 8.5
  Top Layer w0.508: v1(22.225,42.545) 22.225,43.77 R131.2@25.423,46.968
  Bottom Layer w0.508: M1.16@22.225,39.791 v1(22.225,42.545)
NetM1_17: M1.17 R130.2 | length 8.4
  Top Layer w0.508: v1(20.193,42.418) 20.193,43.561 23.188,46.556 R130.2@23.188,46.968
  Bottom Layer w0.508: M1.17@20.193,39.759 v1(20.193,42.418)
NetM1_18: M1.18 R129.2 | length 8.4
  Top Layer w0.508: v1(18.161,42.672) 18.161,44.177 R129.2@20.952,46.968
  Bottom Layer w0.508: M1.18@18.157,39.723 v1@18.157,42.668
NetP14_1: P14.1 R94.1 | length 18.6
  Bottom Layer w0.254: P14.1@23.114,33.02 23.114,30.48 24.511,29.083 27.051,29.083 29.083,27.051 29.083,24.13 28.321,23.368 25.908,23.368 25.146,22.606 R94.1@25.146,21.463
NetP14_3: P14.3 R95.1 | length 14.9
  Bottom Layer w0.254: P14.3@25.654,33.02 25.654,30.226 26.289,29.591 27.261,29.591 29.591,27.261 29.591,23.92 28.531,22.86 28.15,22.86 27.432,22.142 R95.1@27.432,21.463
NetP14_5: P14.5 R96.1 | length 12.5
  Bottom Layer w0.254: P14.5@28.194,33.02 28.194,29.377 30.099,27.472 30.099,23.709 29.718,23.328 R96.1@29.718,21.463
NetP16_1: P16.1 R125.2 | length 3.8
  Top Layer w0.254: P16.1@83.185,54.229 84.963,52.451 R125.2@84.963,51.181